# EAGLE board ground logic thing v2 (EAGLE 9.7.0)
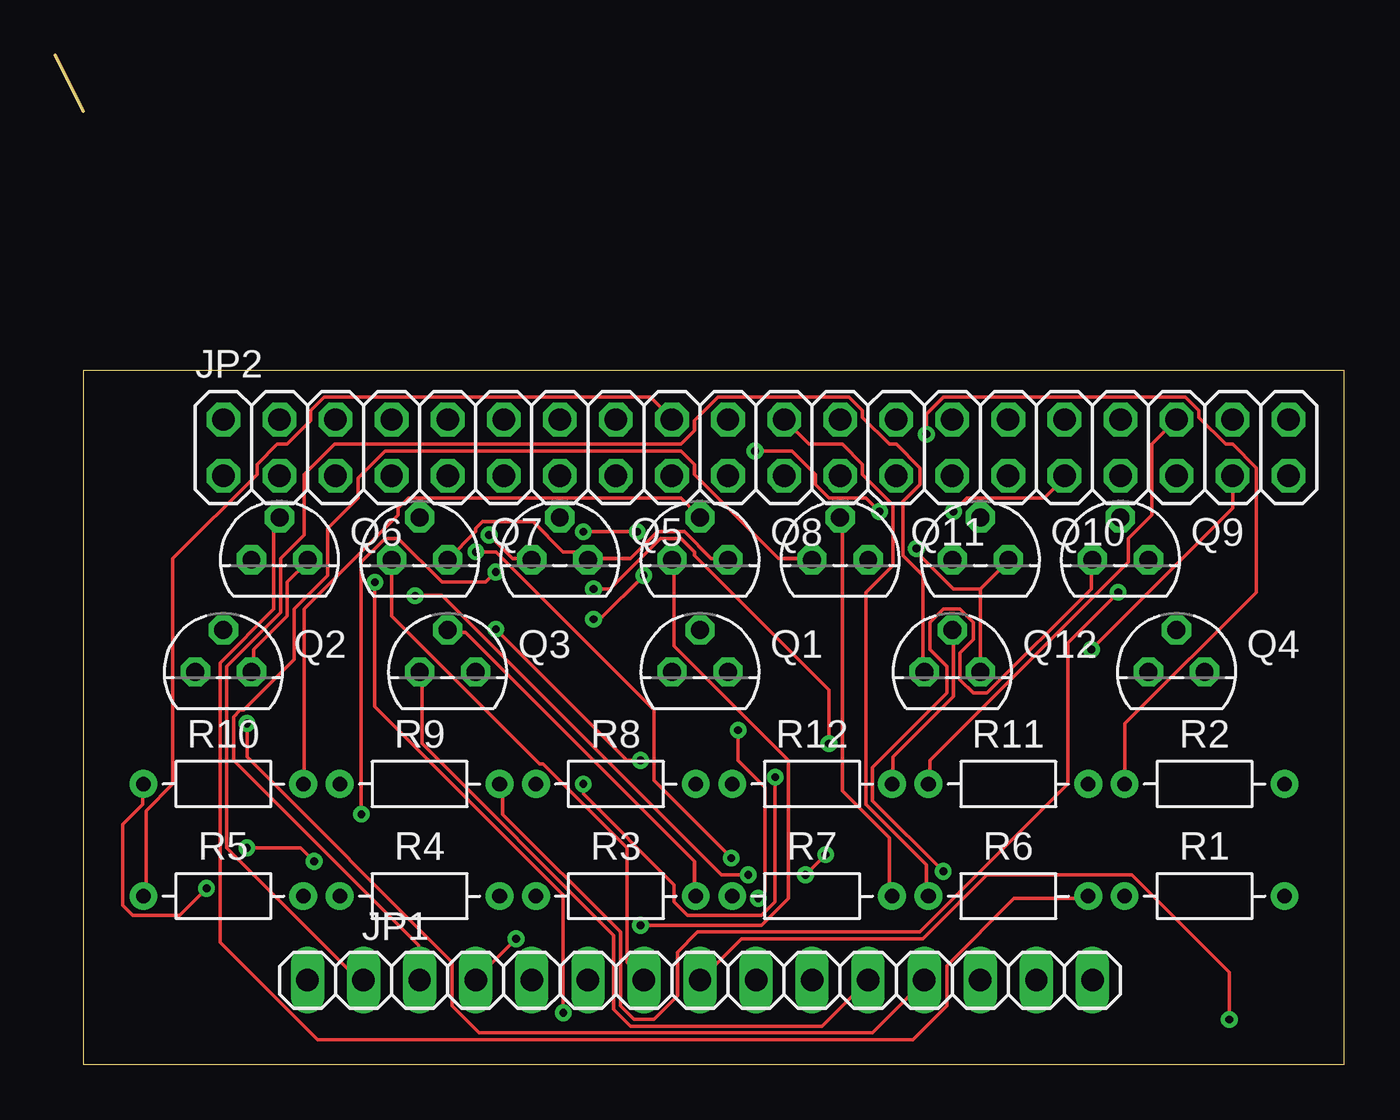
[diagram p0: board, top side]
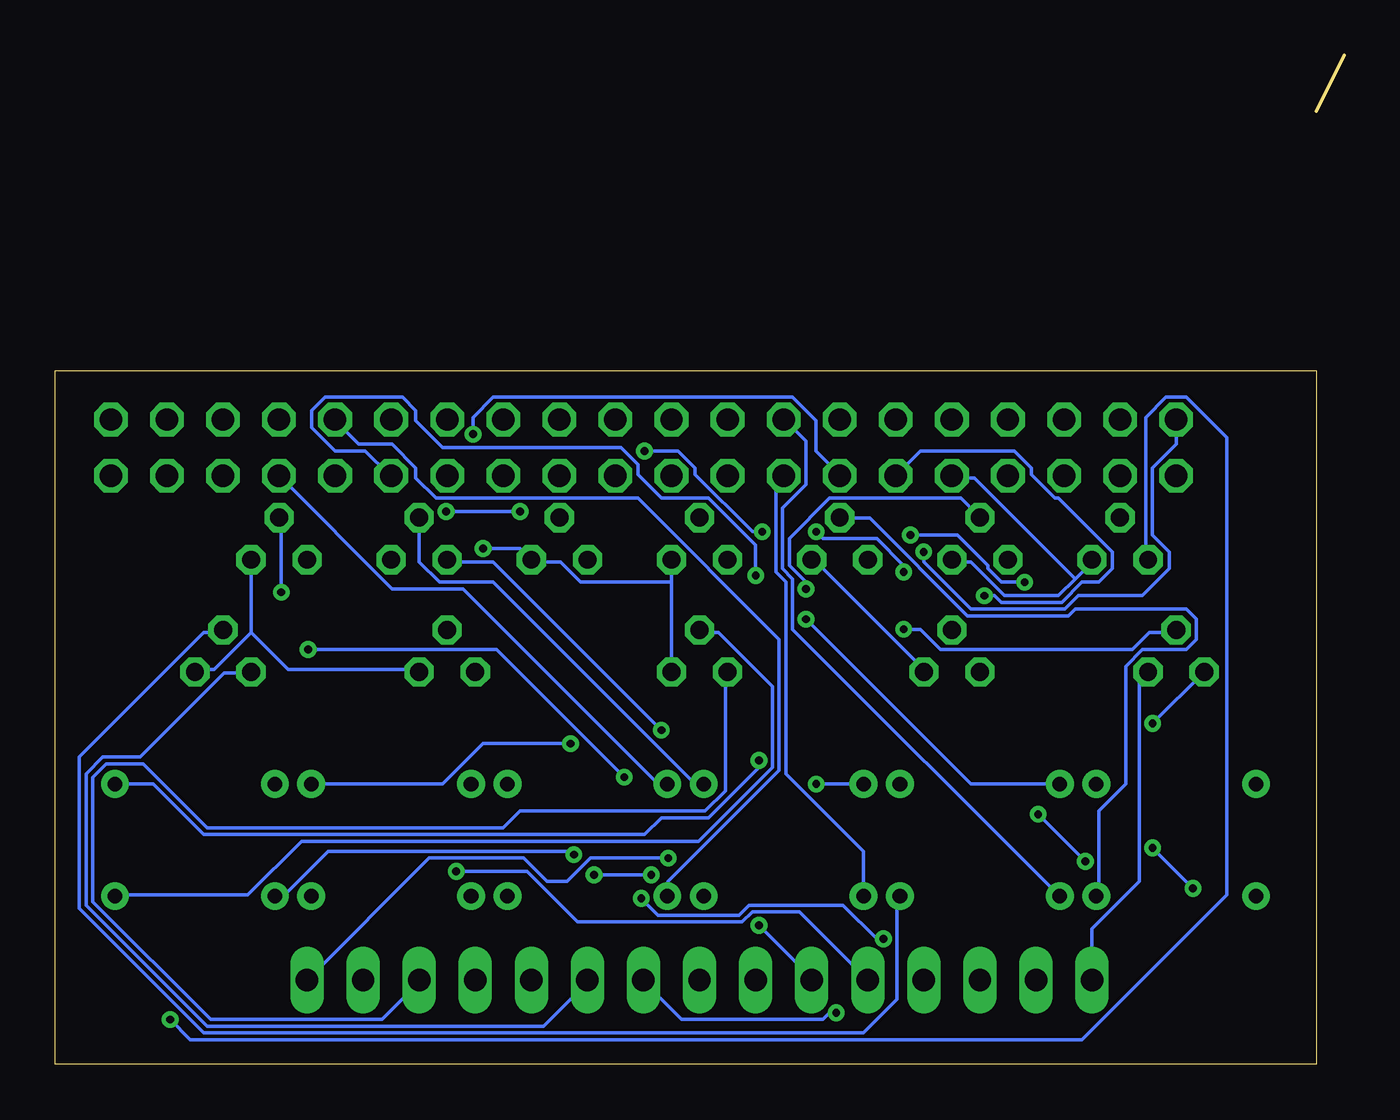
[diagram p1: board, bottom side, seen from below]

Size 58.4 x 45.72 mm. Coordinates in mm from the lower left corner, seen from the top.
Outline: 0,45.72 1.27,43.18
Outline: 1.27,0 58.4,0 58.4,31.42 1.27,31.42 1.27,0
Copper layers (1*16): Top 0.035mm / dielectric 1.5mm / Bottom 0.035mm
Design rules "default": minimum track width 6mil, minimum drill 0.35mm, track to track 6mil, track to pad 6mil, pad to pad 6mil, via to via 6mil, smd to smd 6mil, copper to edge 40mil, drill to drill 6mil, minimum pad ring 10mil, minimum via ring 8mil, stop-mask expansion 4mil, vias tented up to drill 0mil, thermal gap 10mil

## Footprints (pad centres in the part's own frame; a part is rotated, then mirrored left to right if it is on the bottom)
1X15 = drill 1.016 long: 1 -17.78,0; 2 -15.24,0; 3 -12.7,0; 4 -10.16,0; 5 -7.62,0; 6 -5.08,0; 7 -2.54,0; 8 0,0; 9 2.54,0; 10 5.08,0; 11 7.62,0; 12 10.16,0; 13 12.7,0; 14 15.24,0; 15 17.78,0
2X20 = drill 1.016 octagon: 1 -24.13,-1.27; 2 -24.13,1.27; 3 -21.59,-1.27; 4 -21.59,1.27; 5 -19.05,-1.27; 6 -19.05,1.27; 7 -16.51,-1.27; 8 -16.51,1.27; 9 -13.97,-1.27; 10 -13.97,1.27; 11 -11.43,-1.27; 12 -11.43,1.27; 13 -8.89,-1.27; 14 -8.89,1.27; 15 -6.35,-1.27; 16 -6.35,1.27; 17 -3.81,-1.27; 18 -3.81,1.27; 19 -1.27,-1.27; 20 -1.27,1.27; 21 1.27,-1.27; 22 1.27,1.27; 23 3.81,-1.27; 24 3.81,1.27; 25 6.35,-1.27; 26 6.35,1.27; 27 8.89,-1.27; 28 8.89,1.27; 29 11.43,-1.27; 30 11.43,1.27; 31 13.97,-1.27; 32 13.97,1.27; 33 16.51,-1.27; 34 16.51,1.27; 35 19.05,-1.27; 36 19.05,1.27; 37 21.59,-1.27; 38 21.59,1.27; 39 24.13,-1.27; 40 24.13,1.27
TO92 = drill 0.813 octagon: 1 1.27,0; 2 0,1.905; 3 -1.27,0
RESAD724W46L381D178B = drill 0.66 pad 1.26: 1 -3.62,0; 2 3.62,0

## Placement (x,y rotation side)
JP1  PINHD-1X15  [1X15]  29.21,3.81 0 top
JP2  PINHD-2X20  [2X20]  31.75,27.94 0 top
Q1  2N3904  [TO92]  29.21,17.78 0 top
Q2  2N3904  [TO92]  7.62,17.78 0 top
Q3  2N3904  [TO92]  17.78,17.78 0 top
Q4  2N3904  [TO92]  50.8,17.78 0 top
Q5  2N3904  [TO92]  22.86,22.86 0 top
Q6  2N3904  [TO92]  10.16,22.86 0 top
Q7  2N3904  [TO92]  16.51,22.86 0 top
Q8  2N3904  [TO92]  29.21,22.86 0 top
Q9  2N3904  [TO92]  48.26,22.86 0 top
Q10  2N3904  [TO92]  41.91,22.86 0 top
Q11  2N3904  [TO92]  35.56,22.86 0 top
Q12  2N3904  [TO92]  40.64,17.78 0 top
R1  [RESAD724W46L381D178B]  52.07,7.62 0 top
R2  [RESAD724W46L381D178B]  52.07,12.7 0 top
R3  [RESAD724W46L381D178B]  25.4,7.62 0 top
R4  [RESAD724W46L381D178B]  16.51,7.62 0 top
R5  [RESAD724W46L381D178B]  7.62,7.62 0 top
R6  [RESAD724W46L381D178B]  43.18,7.62 0 top
R7  [RESAD724W46L381D178B]  34.29,7.62 0 top
R8  [RESAD724W46L381D178B]  25.4,12.7 0 top
R9  [RESAD724W46L381D178B]  16.51,12.7 0 top
R10  [RESAD724W46L381D178B]  7.62,12.7 0 top
R11  [RESAD724W46L381D178B]  43.18,12.7 0 top
R12  [RESAD724W46L381D178B]  34.29,12.7 0 top

## Library data of the parts
JP1 JP2 = Connector; CATEGORY: CONNECTOR; SUB-CATEGORY: PIN-HEADER
Q1-Q12 = Transistor; CATEGORY: Transistor; SUB-CATEGORY: BJT; TYPE: NPN
R1-R12 = Resistor; CATEGORY: Resistor; SUB-CATEGORY: Fixed

## Nets
N$1: Q1.2 R1.2
N$2: Q2.2 R2.2
N$3: Q3.2 R3.2
N$4: Q4.2 R4.2
N$5: Q5.2 R5.2
N$6: Q6.2 R6.2
N$7: Q11.2 R7.2
N$8: Q10.2 R8.2
N$9: Q9.2 R9.2
N$10: Q8.2 R10.2
N$11: Q7.2 R11.2
N$12: Q12.2 R12.2
N$13: JP1.1 JP2.9 Q1.1 Q2.1 Q3.1 Q4.1 Q5.1 Q6.1 Q7.1 Q8.1 Q9.1 Q10.1 Q11.1 Q12.1
N$14: JP2.11 R1.1
N$15: JP2.13 R2.1
N$16: JP2.15 R3.1
N$17: JP2.16 R4.1
N$18: JP2.18 R5.1
N$19: JP2.22 R6.1
N$20: JP2.36 R11.1
N$21: JP2.31 R10.1
N$22: JP2.29 R9.1
N$23: JP2.37 R8.1
N$24: JP2.32 R7.1
N$25: JP2.33 R12.1
N$26: JP1.15 JP2.2
N$27: JP1.2 Q12.3
N$28: JP1.3 Q11.3
N$29: JP1.4 Q10.3
N$30: JP1.5 Q9.3
N$31: JP1.6 Q8.3
N$32: JP1.7 Q7.3
N$33: JP1.8 Q6.3
N$34: JP1.9 Q5.3
N$35: JP1.10 Q4.3
N$36: JP1.11 Q3.3
N$37: JP1.12 Q2.3
N$38: JP1.13 Q1.3

## Tracks (layer width: path | path; a pad name or v marks a point on that pad's centre or on a via)
N$1
  Bottom 0.152: R1.2 55.63,7.67 49.68,7.67 47.24,10.11 29.26,10.11 25.91,13.46 25.91,17.12 28.35,19.56 29.11,19.56 Q1.2
N$2  (via drill 0.35)
  Top 0.152: v26.52,13.77 25.91,13.77 v19.96,19.71
  Bottom 0.152: R2.2 53.95,12.7 51.66,10.41 31.7,10.41 30.94,11.18 28.8,11.18 26.52,13.46 v26.52,13.77 | v19.96,19.71 19.2,19.71 18.29,18.8 9.6,18.8 8.84,19.56 7.62,19.56 Q2.2
N$3
  Top 0.152: R3.2 28.96,7.67 28.96,9.2 18.59,19.56 17.83,19.56 Q3.2
N$4
  Bottom 0.152: R4.2 20.27,7.52 20.27,2.95 21.79,1.42 51.66,1.42 57.3,7.06 57.3,13.92 51.66,19.56 50.9,19.56 Q4.2
N$5
  Bottom 0.152: R5.2 11.12,7.67 11.12,11.48 9.91,12.7 9.91,18.03 9.14,18.8 7.16,18.8 6.71,19.25 6.71,20.17 7.16,20.62 12.19,20.62 12.5,20.32 17.07,20.32 21.49,24.74 22.86,24.74 Q5.2
N$6
  Top 0.152: R6.2 46.79,7.52 43.43,7.52 40.39,4.47 40.39,2.64 38.86,1.12 11.89,1.12 7.47,5.54 7.47,18.19 9.91,20.62 9.91,24.59 10.06,24.74 Q6.2
N$7
  Top 0.152: R7.2 37.8,7.67 37.8,10.26 35.66,12.39 35.66,24.74 Q11.2
N$8
  Bottom 0.152: R8.2 29.41,12.7 38.56,21.84 41,21.84 41.91,22.76 Q10.2
N$9  (via drill 0.35)
  Top 0.152: v48.16,21.39 45.87,19.1 45.87,12.7 39.17,5.99 29.11,5.99 28.19,5.08 28.19,3.1 27.13,2.03 26.21,2.03 25.6,2.64 25.6,5.99 20.27,11.33 20.27,12.7 R9.2
  Bottom 0.152: v48.16,21.39 48.16,24.74 Q9.2
N$10
  Top 0.152: R10.2 11.28,12.7 11.28,20.62 15.55,24.89 15.55,25.2 16,25.65 28.35,25.65 29.11,24.89 Q8.2
N$11  (via drill 0.35)
  Top 0.152: v35.05,14.53 35.05,16.97 28.96,23.06 28.96,23.22 28.35,23.83 27.43,23.83 25.15,21.54 v24.38,21.54
  Bottom 0.152: R11.2 40.84,12.7 39.01,14.53 v35.05,14.53 | v24.38,21.54 24.38,21.84 25.15,22.61 25.15,23.83 23.32,25.65 17.37,25.65 16.61,24.89 Q7.2
N$12
  Top 0.152: R12.2 37.95,12.7 37.95,13.92 40.69,16.66 40.69,19.56 Q12.2
N$13  (via drill 0.35)
  Top 0.152: Q2.1 8.99,17.88 8.99,18.8 10.52,20.32 10.52,21.84 11.43,22.76 Q6.1 | 41.91,21.54 Q12.1 | 41.91,21.54 43.13,22.76 Q10.1 | Q8.1 30.48,22.91 29.72,22.91 28.5,24.13 27.28,24.13 26.06,22.91 24.23,22.91 Q5.1 23.77,23.22 23.01,23.22 21.64,24.59 19.35,24.59 19.05,24.28 19.05,24.13 Q7.1 | 41.91,21.54 40.69,21.54 39.01,23.22 v39.01,23.37
  Bottom 0.152: 12.19,22 11.43,22.76 Q6.1 | 12.19,22 12.95,21.23 15.39,21.23 16.92,22.76 17.68,22.76 Q7.1 | JP1.1 11.43,6.15 9.3,8.28 9.3,17.42 8.99,17.73 Q2.1 | 12.19,22 16.76,26.57 17.68,26.57 JP2.9 | 49.53,19.56 Q9.1 | 49.53,19.56 51.21,17.88 51.97,17.88 Q4.1 | 49.53,19.56 47.85,17.88 41.91,17.88 Q12.1 | Q3.1 19.05,17.88 24.08,22.91 Q5.1 | Q8.1 30.48,21.84 | 30.48,21.84 Q1.1 | 30.48,21.84 34.59,21.84 35.51,22.76 36.73,22.76 Q11.1 37.34,23.37 v39.01,23.37
N$14  (via drill 0.35)
  Top 0.152: v33.98,8.59 v34.9,9.5 | v31.39,8.59 30.17,8.59 17.53,21.23 v16.31,21.23
  Bottom 0.152: v34.9,9.5 35.05,9.65 46.02,9.65 48.01,7.67 48.31,7.67 R1.1 | v31.39,8.59 v33.98,8.59 | v16.31,21.23 15.85,21.23 15.55,20.93 12.8,20.93 11.89,21.84 11.12,21.84 10.52,22.45 10.52,23.22 12.95,25.65 13.11,25.65 14.17,26.72 14.17,27.03 14.93,27.79 19.2,27.79 JP2.11
N$15  (via drill 0.35)
  Top 0.152: v39.47,28.55 39.47,29.46 40.23,30.23 51.21,30.23 51.82,29.62 51.82,29.31 53.03,28.09 53.34,28.09 54.41,27.03 54.41,21.39 48.46,15.44 48.46,12.7 R2.1
  Bottom 0.152: v39.47,28.55 39.47,29.31 38.56,30.23 24.99,30.23 23.93,29.16 23.93,27.79 22.86,26.72 JP2.13
N$16
  Bottom 0.152: R3.1 21.79,7.67 21.79,9.65 25.3,13.16 25.3,21.84 25.76,22.3 25.76,26.26 25.45,26.57 JP2.15
N$17
  Bottom 0.152: R4.1 12.95,7.67 24.99,19.71 24.99,22 25.45,22.45 25.45,25.2 24.38,26.26 24.38,28.25 25.3,29.16 JP2.16
N$18
  Top 0.152: R5.1 4.11,7.67 4.11,11.48 5.33,12.7 5.33,22.91 9.14,26.72 9.14,27.18 10.06,28.09 10.52,28.09 11.58,29.16 11.58,29.62 12.19,30.23 26.98,30.23 27.89,29.31 JP2.18
N$19
  Top 0.152: JP2.22 34.14,28.09 35.66,28.09 36.58,27.18 36.58,26.72 37.95,25.35 37.95,22.61 36.73,21.39 36.73,11.79 39.47,9.04 39.47,7.67 R6.1
N$20
  Top 0.152: JP2.36 49.68,28.09 49.68,24.89 48.62,23.83 48.62,22.76 39.62,13.77 39.62,12.7 R11.1
N$21  (via drill 0.35)
  Top 0.152: v6.86,7.98 5.64,6.76 3.5,6.76 3.05,7.21 3.05,10.87 3.96,11.79 3.96,12.7 R10.1 | v8.69,9.8 11.12,9.8 v11.73,9.2 | v13.87,11.33 13.87,22.76 14.93,23.83 15.55,23.83 17.53,21.84 19.51,21.84 v19.96,22.3 | v26.36,24.13 v23.93,24.13 | v31.7,27.79 33.38,27.79 34.44,26.72 34.44,26.26 35.05,25.65 36.73,25.65 v37.34,25.04 | v40.69,25.04 41.3,25.65 44.81,25.65 45.72,26.57 JP2.31
  Bottom 0.152: v8.69,9.8 v6.86,7.98 | v13.87,11.33 v11.73,9.2 | v19.96,22.3 19.96,22.61 21.18,23.83 23.62,23.83 v23.93,24.13 | v26.36,24.13 26.82,24.13 29.41,26.72 29.41,27.03 30.17,27.79 v31.7,27.79 | v40.69,25.04 v37.34,25.04
N$22  (via drill 0.35)
  Top 0.152: v24.38,20.17 24.69,20.17 v26.67,22.15
  Bottom 0.152: R9.1 16.92,12.7 v24.38,20.17 | v26.67,22.15 26.67,23.52 28.8,25.65 30.94,25.65 32,26.72 32,27.18 32.77,27.94 40.84,27.94 42.06,29.16 42.06,29.62 42.67,30.23 46.18,30.23 46.79,29.62 46.79,28.85 45.72,27.79 44.35,27.79 43.28,26.72 JP2.29
N$23  (via drill 0.35)
  Top 0.152: v23.93,12.7 23.93,12.24 28.04,8.13 28.04,7.37 28.65,6.76 32,6.76 32.61,7.37 v32.61,13 | v46.94,18.8 53.34,25.2 JP2.37
  Bottom 0.152: v23.93,12.7 R8.1 | v32.61,13 38.41,18.8 v46.94,18.8
N$24
  Bottom 0.152: R7.1 30.63,7.67 30.63,8.28 25.6,13.31 25.6,19.25 32,25.65 41.15,25.65 42.06,26.57 42.06,27.03 43.13,28.09 44.65,28.09 45.72,29.16 JP2.32
N$25
  Bottom 0.152: R12.1 31.09,12.7 39.93,21.54 43.13,21.54 JP2.33
N$26  (via drill 0.35)
  Top 0.152: v19.05,23.22 19.96,23.22 27.13,16.05 27.13,12.85 v30.63,9.35
  Bottom 0.152: JP2.2 7.62,28.09 8.69,27.03 8.69,23.98 7.92,23.22 7.92,22.45 9.14,21.23 12.04,21.23 12.65,20.62 16.92,20.62 19.05,22.76 v19.05,23.22 | v30.63,9.35 34.14,9.35 35.2,8.28 36.12,8.28 37.19,9.35 41.45,9.35 JP1.15
N$27
  Top 0.152: Q12.3 39.32,17.88 39.32,22.15 38.41,23.06 38.41,25.5 39.17,26.26 39.17,27.03 38.1,28.09 37.8,28.09 36.58,29.31 36.58,29.62 35.97,30.23 30.02,30.23 28.96,29.16 28.96,28.7 28.35,28.09 12.65,28.09 11.28,26.72 11.28,23.98 10.21,22.91 10.21,20.47 7.77,18.03 7.77,9.8 13.87,3.71 JP1.2
N$28
  Top 0.152: Q11.3 34.29,22.91 32.77,22.91 28.96,26.72 28.96,27.18 28.35,27.79 14.93,27.79 13.72,26.57 13.72,25.65 12.34,24.28 12.34,22.15 10.82,20.62 10.82,18.34 8.53,16.05 8.38,16.05 8.08,15.75 8.08,13.77 16.46,5.39 16.46,3.86 JP1.3
N$29  (via drill 0.35)
  Top 0.152: v30.94,15.14 30.94,13.77 32.16,12.55 32.16,7.82 v31.85,7.52 | v20.88,5.69 19.05,3.86 JP1.4
  Bottom 0.152: v30.94,15.14 38.56,22.76 40.54,22.76 Q10.3 | v31.85,7.52 31.09,6.76 27.43,6.76 26.98,7.21 22.71,7.21 21.18,5.69 v20.88,5.69
N$30  (via drill 0.35)
  Top 0.152: v40.23,8.74 37.03,11.94 37.03,13.46 40.39,16.81 40.39,18.03 39.62,18.8 39.62,20.02 40.23,20.62 41,20.62 41.61,20.02 41.61,19.25 41,18.64 41,17.42 41.61,16.81 42.22,16.81 46.94,21.54 46.94,22.76 Q9.3
  Bottom 0.152: v40.23,8.74 37.03,8.74 34.75,6.45 27.28,6.45 26.82,6.91 24.69,6.91 JP1.5
N$31  (via drill 0.35)
  Top 0.152: v26.52,6.3 32,6.3 33.22,7.52 33.22,13.77 28.04,18.95 28.04,22.76 Q8.3
  Bottom 0.152: v26.52,6.3 24.08,3.86 JP1.6
N$32
  Top 0.152: Q7.3 15.24,20.32 21.95,13.61 22.1,13.61 25.91,9.8 25.91,4.62 26.67,3.86 JP1.7
N$33  (via drill 0.35)
  Top 0.152: v53.19,2.03 53.19,4.17 48.77,8.59 42.22,8.59 39.32,5.69 31.09,5.69 JP1.8
  Bottom 0.152: v53.19,2.03 52.27,1.12 11.89,1.12 5.33,7.67 5.33,28.4 7.16,30.23 8.08,30.23 8.99,29.31 8.99,22.91 Q6.3
N$34  (via drill 0.35)
  Top 0.152: v19.66,23.98 20.73,22.91 21.49,22.91 Q5.3 | v14.48,21.84 14.48,16.2 23.01,7.67 v23.01,2.34
  Bottom 0.152: v19.66,23.98 17.53,23.98 16.15,22.61 16.15,22.45 15.55,21.84 v14.48,21.84 | v23.01,2.34 23.32,2.34 23.62,2.03 30.02,2.03 31.7,3.71 JP1.9
N$35
  Bottom 0.152: Q4.3 49.53,17.73 50.75,17.73 54.56,13.92 56.24,13.92 57,13.16 57,7.21 51.51,1.73 36.27,1.73 34.29,3.71 JP1.10
N$36
  Top 0.152: JP1.11 34.75,1.73 26.06,1.73 25.3,2.49 25.3,5.84 16.61,14.53 16.61,17.73 Q3.3
N$37  (via drill 0.35)
  Top 0.152: v8.69,15.44 8.69,13.92 17.98,4.62 17.98,2.64 19.2,1.42 37.03,1.42 39.32,3.71 JP1.12
  Bottom 0.152: v8.69,15.44 Q2.3
N$38
  Bottom 0.152: Q1.3 28.04,17.73 28.04,12.39 28.96,11.48 37.34,11.48 38.1,10.72 51.51,10.72 54.41,13.61 56.08,13.61 56.69,13 56.69,7.37 51.36,2.03 43.59,2.03 41.91,3.71 JP1.13